# Altium PCB 电阻式.PcbDoc
Units mil, origin at the board's own origin, x right, y up, seen from the top; angles counter-clockwise.
Board outline 2915.1 x 2580.1 mil, 2 copper layers (Top Layer, Bottom Layer); 43 components, 20 nets, 104 pads, 0 vias.
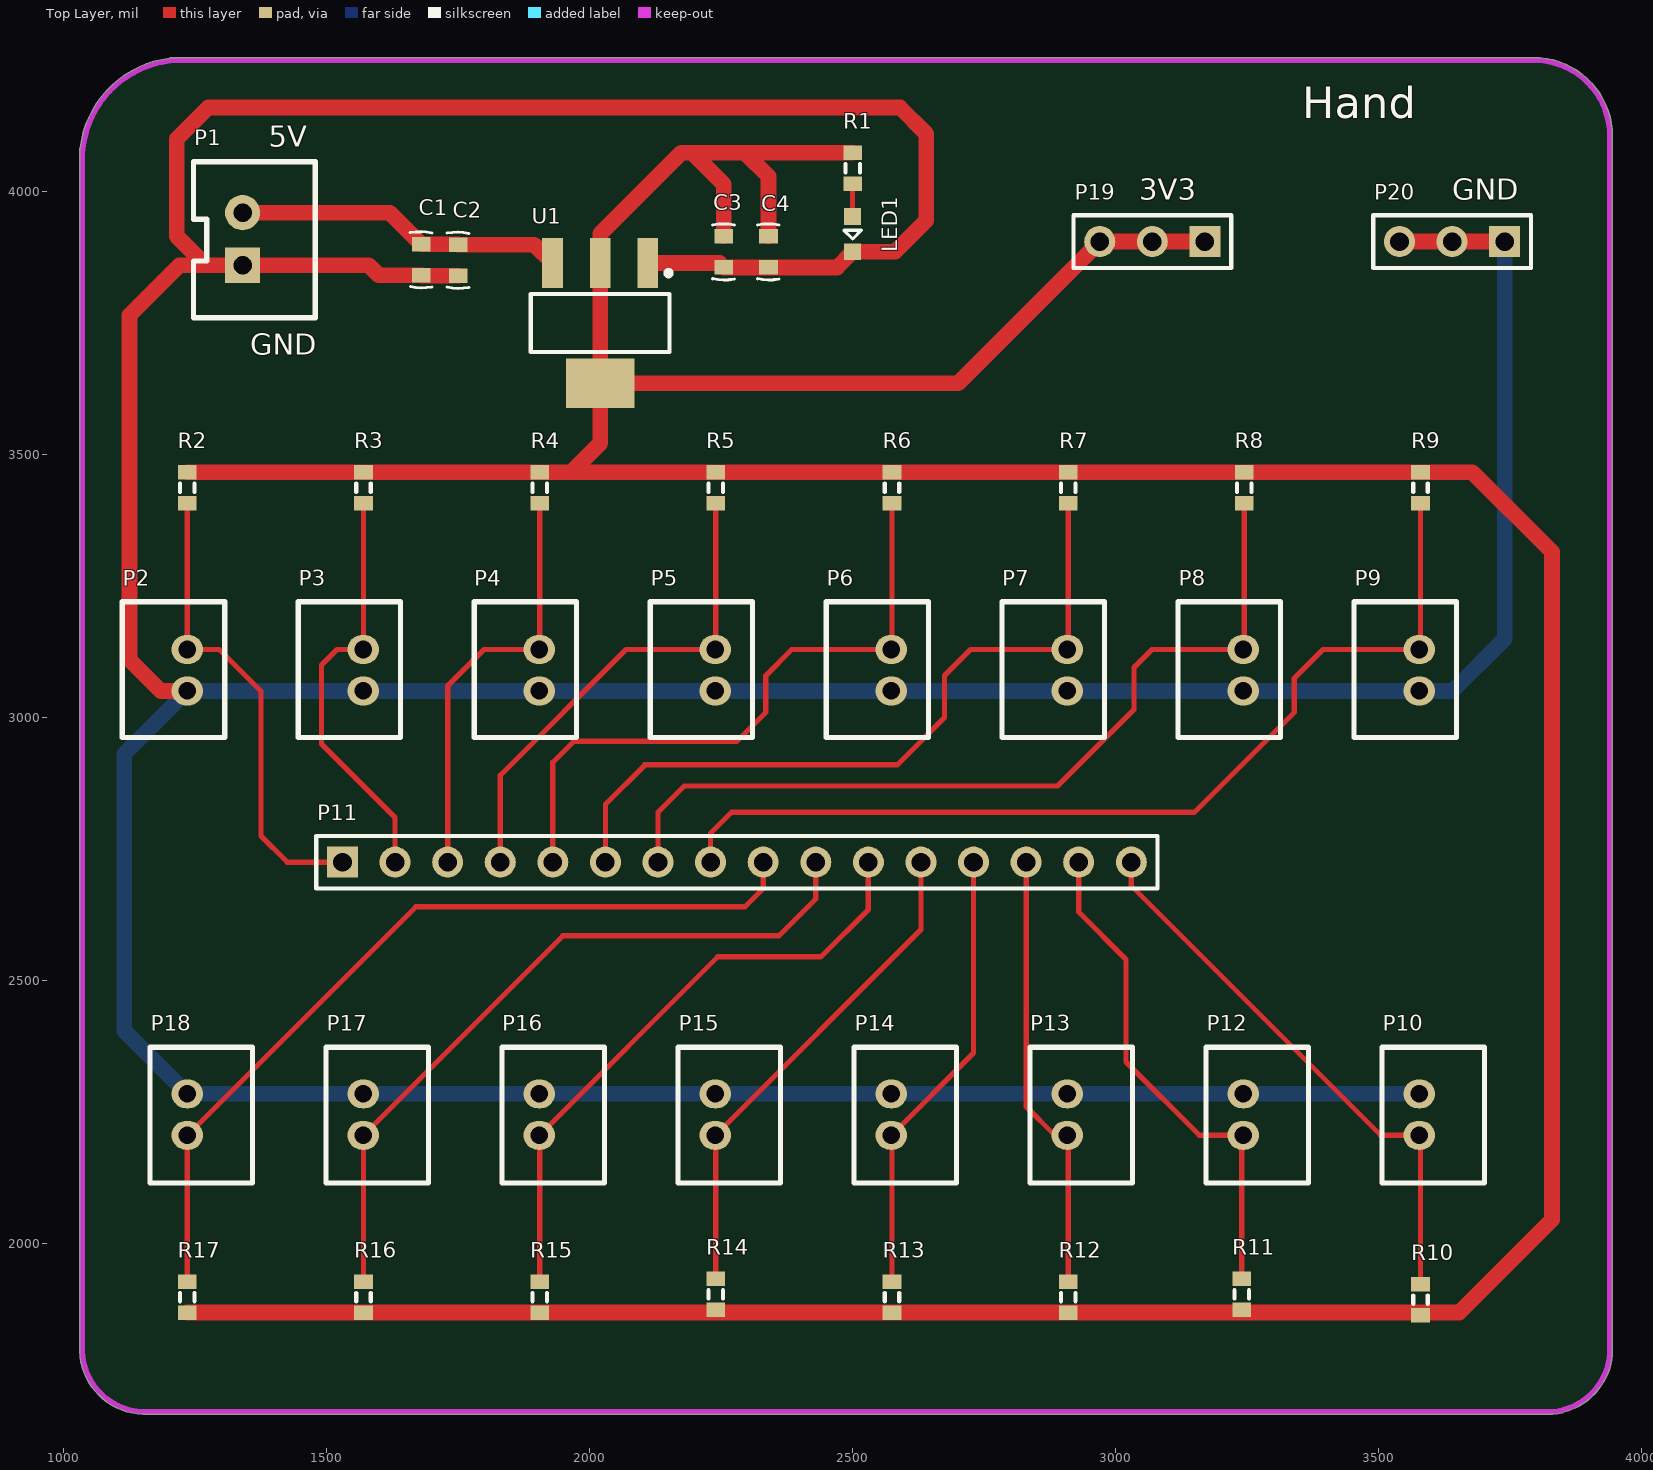
[diagram p0: Top Layer view]
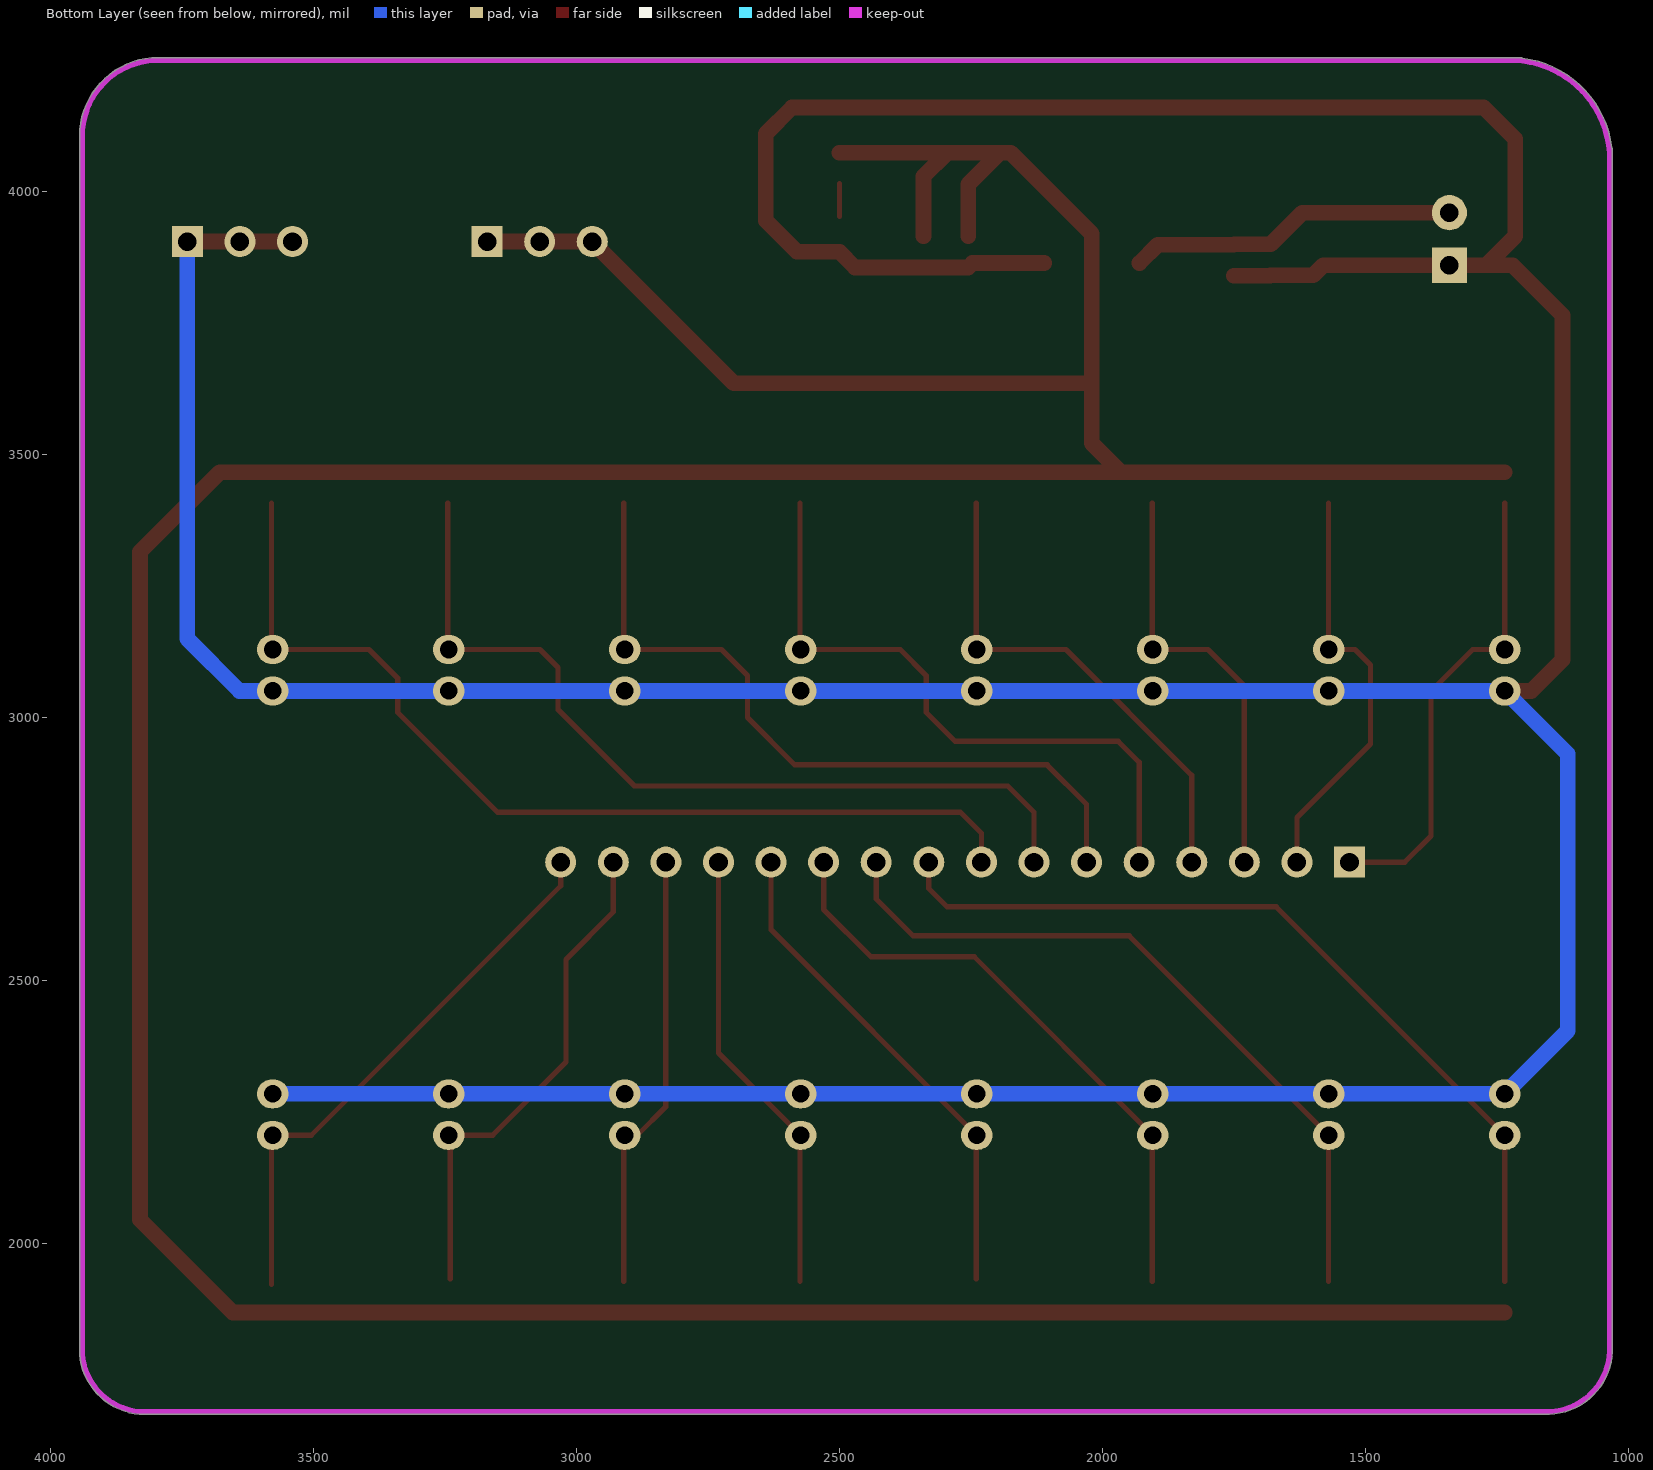
[diagram p1: Bottom Layer view, seen from below]
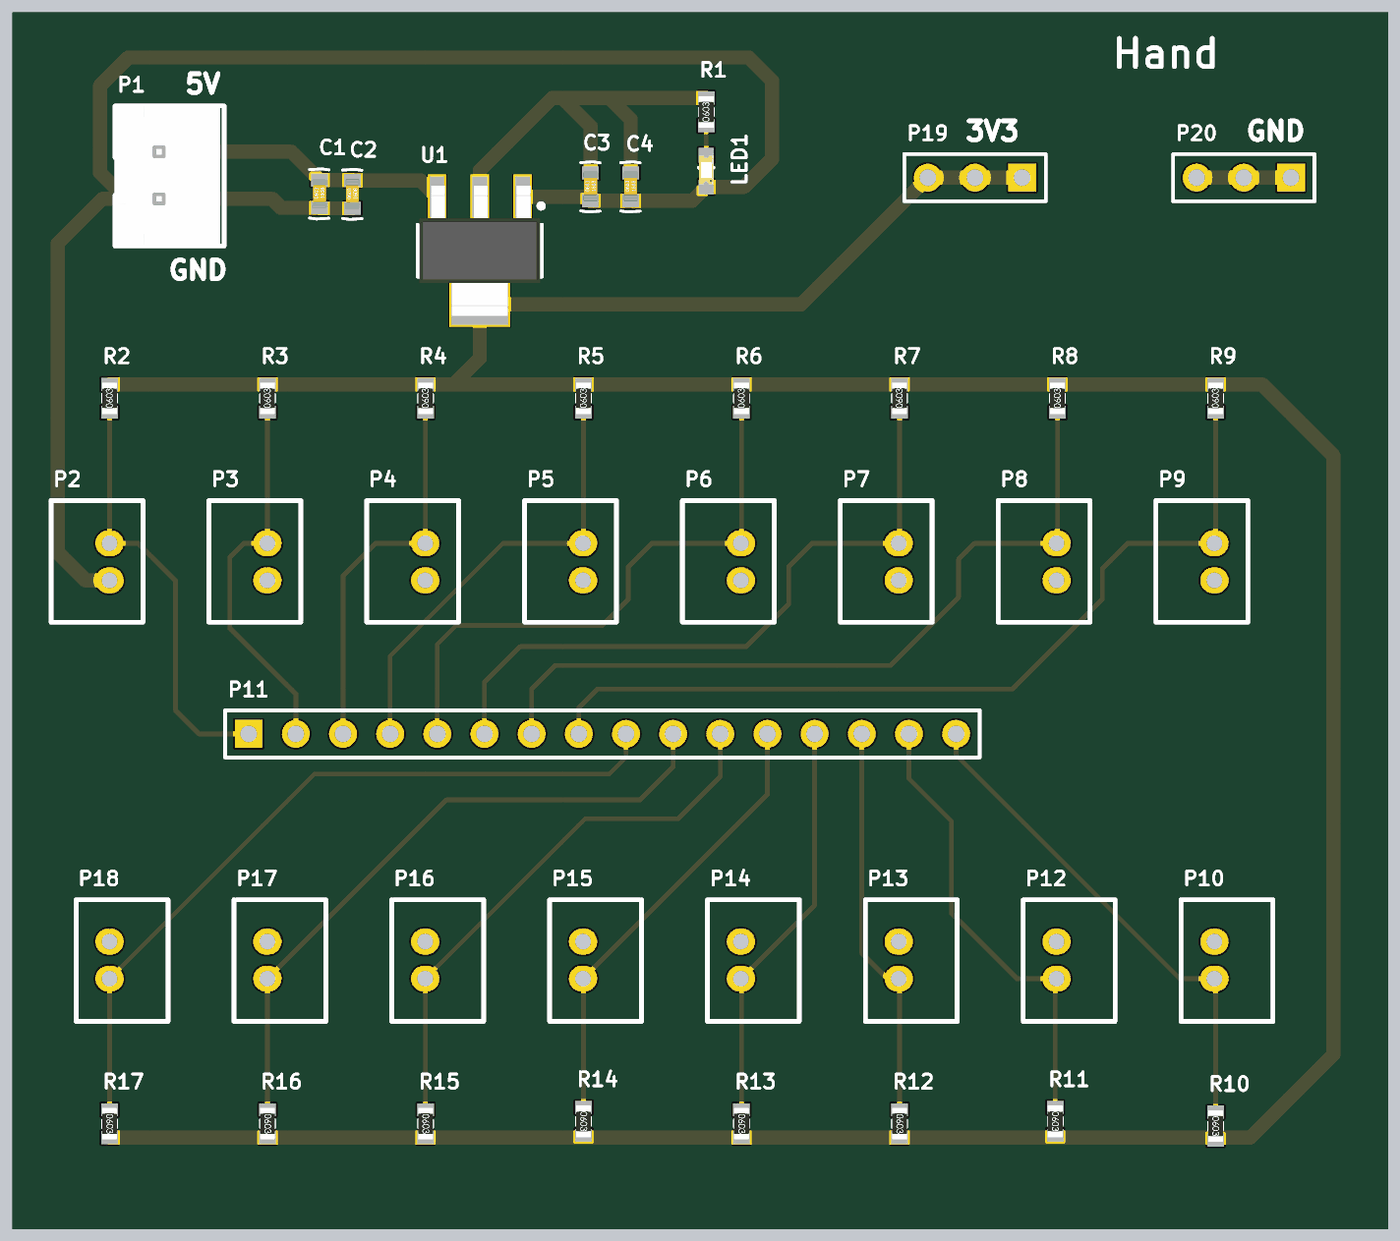
[diagram p2: 3D render of the assembled board from above, using the file's embedded part models]

## Layer stack, top to bottom
Top Solder: solder mask 0.4, Solder Resist, Dk 3.5
Top Layer: signal copper 1.4
Dielectric 1: dielectric 12.6, FR-4, Dk 4.8
Bottom Layer: signal copper 1.4
Bottom Solder: solder mask 0.4, Solder Resist, Dk 3.5

## Board outline
1029.99,1794.79 cw(c1035,1795) 1029.98,1795 1029.98,4059.19 cw(c1034.93,4060) 1029.92,4060 cw(c1225,4060) 1029.98,4065.07 1029.98,4080 cw(c1035,4080) 1031.33,4083.42 cw(c1225,4060) 1201.58,4253.67 cw(c1205,4250) 1205,4255.02 1219.93,4255.02 cw(c1225,4060) 1230.07,4255.02 cw(c1225,4060) 1230.13,4255.01 1230.07,4255.02 3795,4255.02 cw(c3795,4105) 3945.01,4105 3945.01,1790 cw(c3940,1790) 3945,1789.58 cw(c3820,1800) 3830.42,1675 cw(c3830,1680) 3830,1674.98 1150,1674.98 cw(c1150,1680) 1149.79,1674.99 cw(c1155,1800)

## Design rules (kind name [scope] priority, off if disabled: settings)
Clearance [All] p1: gap=10 ignorepadtopadclearanceinfootprint=FALSE except(0: Arc-Hole Track-Hole SMDPad-Hole THPad-Hole Via-Hole Fill-Hole Poly-Hole Region-Hole Text-Hole)
PolygonConnect [All] p1: connectstyle=Relief reliefconductorwidth=10 reliefentries=4 polygonreliefangle="90 Angle" airgapwidth=10
RoutingVias [All] p1: holewidth=28 width=50 viastyle="Through Hole" minholewidth=28 minwidth=50 maxholewidth=28 maxwidth=50
SolderMaskExpansion [All] p1: expansion=4
Width [All] p1: maxlimit=50 minlimit=10 preferedwidth=10
30 further rules are at their usual default settings.

## Components (designator, comment, footprint, x,y, rotation, side; value= is the part's Value field where it differs from the comment)
C1 "" C-0603 1701,3852.47 r90 top value=10uF
C2 "" C-0603 1771,3851.53 r90 top value=0.1uF
C3 "" C-0603 2276,3867.47 r90 top value=0.1uF
C4 "" C-0603 2361,3867.47 r90 top value=10uF
LED1 "" CLED1608-0603 2418,3906.53 r270 top
P1 "Header 2" XH2.54-LI-2P 1340,3910 r90 top
P2 "Header 2" XH2.0_2p 1235,3090 r270 top
P3 "Header 2" XH2.0_2p 1569.67,3090 r270 top
P4 "Header 2" XH2.0_2p 1904.33,3090 r270 top
P5 "Header 2" XH2.0_2p 2239,3090 r270 top
P6 "Header 2" XH2.0_2p 2573.67,3090 r270 top
P7 "Header 2" XH2.0_2p 2908.33,3090 r270 top
P8 "Header 2" XH2.0_2p 3243,3090 r270 top
P9 "Header 2" XH2.0_2p 3577.67,3090 r270 top
P10 "Header 2" XH2.0_2p 3577.67,2245 r90 top
P11 "Header 16" HDR1X16 1530,2725 r0 top
P12 "Header 2" XH2.0_2p 3243,2245 r90 top
P13 "Header 2" XH2.0_2p 2908.33,2245 r90 top
P14 "Header 2" XH2.0_2p 2573.67,2245 r90 top
P15 "Header 2" XH2.0_2p 2239,2245 r90 top
P16 "Header 2" XH2.0_2p 1904.33,2245 r90 top
P17 "Header 2" XH2.0_2p 1569.67,2245 r90 top
P18 "Header 2" XH2.0_2p 1235,2245 r90 top
P19 "Header 3" HDR1X3 3170,3905 r180 top
P20 "Header 3" HDR1X3 3740,3905 r180 top
R1 "Res3" R-0603 2500,4042.53 r90 top value=370R
R2 "Res3" R-0603 1235,3435 r90 top value=10k
R3 "Res3" R-0603 1570,3435 r90 top value=10k
R4 "Res3" R-0603 1905,3435 r90 top value=10k
R5 "Res3" R-0603 2240,3435 r90 top value=10k
R6 "Res3" R-0603 2575,3435 r90 top value=10k
R7 "Res3" R-0603 2910,3435 r90 top value=10k
R8 "Res3" R-0603 3245,3435 r90 top value=10k
R9 "Res3" R-0603 3580,3435 r90 top value=10k
R10 "Res3" R-0603 3580,1895 r270 top value=10k
R11 "Res3" R-0603 3240,1905 r270 top value=10k
R12 "Res3" R-0603 2910,1900 r270 top value=10k
R13 "Res3" R-0603 2575,1900 r270 top value=10k
R14 "Res3" R-0603 2240,1905 r270 top value=10k
R15 "Res3" R-0603 1905,1900 r270 top value=10k
R16 "Res3" R-0603 1570,1900 r270 top value=10k
R17 "Res3" R-0603 1235,1900 r270 top value=10k
U1 "AMS1117-3V3" LM317 2015,3750 r270 top value=Value

## Footprints (in the part's own frame and the unit in brackets; to place one, negate y for a bottom-side part, rotate by r counter-clockwise, add the part's x,y. Pads: shape width x height; smd on the part's side, far side on the other; paste and mask are expansions set on the pad)
C-0603 [mm]
  rect 0.7x0.9 smd: 1(-0.293,0.533) 2(1.207,0.533)
  silkscreen extent -0.9,0.02 1.81,1.07, body extent -0.32,0.13 1.28,0.93, height 0.8
CLED1608-0603 [mil]
  rect 32x32 smd: 1(-46,82) 2(20.93,82)
  silkscreen extent -20,65 -4,99, body extent -46,67 16,98, height 24
HDR1X3 [mm] "Connector; Header; 3 Position"
  rect 1.5x1.5 hole 0.9: 1(0,0)
  round 1.5 hole 0.9: 2(2.54,0) 3(5.08,0)
  silkscreen extent -1.27,-1.27 6.35,1.27
HDR1X16 [mm] "Connector; Header; 16 Position"
  rect 1.5x1.5 hole 0.9: 1(0,0)
  round 1.5 hole 0.9: 2(2.54,0) 3(5.08,0) 4(7.62,0) 5(10.16,0) 6(12.7,0) 7(15.24,0) 8(17.78,0) 9(20.32,0) 10(22.86,0) 11(25.4,0) 12(27.94,0) 13(30.48,0) 14(33.02,0) 15(35.56,0) 16(38.1,0)
  silkscreen extent -1.27,-1.27 39.37,1.27
LM317 [mm] "LM317, SOT23"
  rect 2.4x1 smd paste-0.102 mask+0.051: 1(-2.9,2.427) 2(-2.9,0.127) 3(-2.9,-2.173)
  rect 2.4x3.3 smd paste-0.102 mask+0.051: 4(2.9,0.127)
  silkscreen extent -2.54,-3.22 1.4,3.55, body extent -3.5,-3.12 3.5,3.38, height 1.68
R-0603 [mm]
  rect 0.7x0.9 smd: 1(-0.699,0) 2(0.801,0)
  silkscreen extent -0.15,-0.35 0.25,0.35, body extent -0.8,-0.4 0.9,0.4, height 0.56
XH2.0_2p [mm]
  oval 1.4x1.524 hole 0.85: 1(-1,0) 2(1,0)
  silkscreen extent -3.3,-3.15 3.25,1.8
XH2.54-LI-2P [mm] "接插件，2P"
  rect 1.7x1.7 hole 0.9: 1(-1.27,0)
  round 1.7 hole 0.9: 2(1.27,0)
  silkscreen extent -3.81,-3.51 3.74,2.37, body extent -3.77,-3.3 3.77,2.4, height 7.05

## Part data
C1 C2 C3 C4: library part "Cap Semi", "Capacitor (Semiconductor SIM Model)", LatestRevisionDate=29-May-2009, LatestRevisionNote="IPC-7351 Footprint Added.", PackageDescription="Chip Capacitor", PackageReference=C1206, Published=8-Jun-2000, Publisher="Altium Limited"
LED1: library part "LED Chip", "Typical Chip LED", Published=8-Jun-2000, Publisher="Altium Limited", Revision="July-2002: Re-released for DXP Platform."
P1 P2 P3 P4 P5 P6 P7 P8 P9 P10 P12 P13 P14 P15 P16 P17 P18: "Header, 2-Pin", LatestRevisionDate=17-Jul-2002, LatestRevisionNote="Re-released for DXP Platform.", Publisher="Altium Limited"
P11: "Header, 16-Pin", LatestRevisionDate=17-Jul-2002, LatestRevisionNote="Re-released for DXP Platform.", Publisher="Altium Limited"
P19 P20: "Header, 3-Pin", LatestRevisionDate=17-Jul-2002, LatestRevisionNote="Re-released for DXP Platform.", Publisher="Altium Limited"
R1 R2 R3 R4 R5 R6 R7 R8 R9 R10 R11 R12 R13 R14 R15 R16 R17: "Resistor", LatestRevisionDate=29-May-2009, LatestRevisionNote="IPC-7351 Footprint Added.", PackageDescription="Chip Resistor", PackageReference=J1-0603, Published=8-Jun-2000, Publisher="Altium Limited"
U1: library part LM317DCYR, "LM317DCYR-SOT223", Alternate_PartNumber=LM317DCY, Manufacturer="Texas Instruments", CompType=IC, MountType=SMT, PackageReference=DCY0004A, PartNumber=LM317DCYR, PIN_COUNT=4, RefDes=RefDes, RoHS=Y, SymbolCreater=Altium, TYPE=TYPE

## Nets (pads, with @x,y where several pads share a name; then routed paths per layer and width w, separated by ;. In a path a pad name is that pad's centre, name@x,y a point inside that pad or via, vN(x,y) a via of type N, cw(c..) or ccw(c..) an arc to the next point about the centre after c; other vN are vias at no path point)
ADC1: P2.1 P11.1 R2.1 | length 901.7
  Top Layer w10: R2.1 P2.1 1295.63,3129.37 1375,3050 1375,2775 1425,2725 P11.1
ADC2: P3.1 P11.2 R3.1 | length 803.1
  Top Layer w10: R3.1 1570,3129.7 P3.1 1519.37,3129.37 1490,3100 1490,2950 1630,2810 P11.2
ADC3: P4.1 P11.3 R4.1 | length 816.4
  Top Layer w10: P11.3 1730,3060 1799.37,3129.37 P4.1 1905,3130.04 R4.1
ADC4: P5.1 P11.4 R5.1 | length 951.7
  Top Layer w10: P11.4 1830,2890 2069.37,3129.37 P5.1 2240,3130.37 R5.1
ADC5: P6.1 P11.5 R6.1 | length 1242.1
  Top Layer w10: P11.5 1930,2915 1970,2955 2280,2955 2335,3010 2335,3080 2384.37,3129.37 P6.1 2575,3130.7 R6.1
ADC6: P7.1 P11.6 R7.1 | length 1435.9
  Top Layer w10: P11.6 2030,2835 2105,2910 2585,2910 2675,3000 2675,3080 2724.37,3129.37 P7.1 2910,3131.04 R7.1
ADC7: P8.1 P11.7 R8.1 | length 1661.9
  Top Layer w10: P11.7 2130,2820 2180,2870 2890,2870 3035,3015 3035,3095 3069.37,3129.37 P8.1 3245,3131.37 R8.1
ADC8: P9.1 P11.8 R9.1 | length 1864.5
  Top Layer w10: P11.8 2230,2780 2270,2820 3150,2820 3340,3010 3340,3075 3394.37,3129.37 P9.1 3580,3131.7 R9.1
ADC9: P11.9 P18.1 R17.1 | length 1617.5
  Top Layer w10: R17.1 P18.1 1669.37,2640 2295,2640 2330,2675 P11.9
ADC10: P11.10 P17.1 R16.1 | length 1394.7
  Top Layer w10: R16.1 1570,2205.3 P17.1 1949.04,2585 2360,2585 2430,2655 P11.10
ADC11: P11.11 P16.1 R15.1 | length 1171.9
  Top Layer w10: R15.1 1905,2204.96 P16.1 2243.7,2545 2440,2545 2530,2635 P11.11
ADC12: P11.12 P15.1 R14.1 | length 954.8
  Top Layer w10: R14.1 2240,2204.63 P15.1 2630,2596.63 P11.12
ADC13: P11.13 P14.1 R13.1 | length 862.8
  Top Layer w10: R13.1 2575,2204.3 P14.1 2730,2361.96 P11.13
ADC14: P11.14 P13.1 R12.1 | length 844.6
  Top Layer w10: P11.14 2830,2260 2884.37,2205.63 P13.1 2910,2203.96 R12.1
ADC15: P11.15 P12.1 R11.1 | length 972.4
  Top Layer w10: P11.15 2930,2630 3020,2540 3020,2345 3159.37,2205.63 P12.1 3240,2202.63 R11.1
ADC16: P10.1 P11.16 R10.1 | length 1073.2
  Top Layer w10: P11.16 3030,2680 3504.37,2205.63 P10.1 3580,2203.3 R10.1
AGND: C1.1 C2.1 C3.1 C4.1 LED1.2 P1.1 P2.2 P3.2 P4.2 P5.2 P6.2 P7.2 P8.2 P9.2 P10.2 P12.2 P13.2 P14.2 P15.2 P16.2 P17.2 P18.2 P20.1 P20.2 P20.3 U1.1 | length 10639.8
  Top Layer w30: P2.2 1184.37,3050.63 1125,3110 1125,3765 1220,3860 1270,3860 ; C2.1 1680.94,3840 C1.1 1599.06,3840.94 1580,3860 P1.1 1270,3860 ; U1.1 2246.77,3864.17 C3.1 C4.1 2470.35,3855.94 LED1.2 2580.6,3885.6 2640,3945 2640,4110 2590,4160 1275,4160 1215,4100 1215,3915 1270,3860 ; P20.3 P20.2 P20.1
  Bottom Layer w30: P10.2 P12.2 P13.2 P14.2 P15.2 P16.2 P17.2 P18.2 1115,2404.37 1115,2930.63 P2.2 P3.2 P4.2 P5.2 P6.2 P7.2 P8.2 P9.2 3640.63,3050.63 3740,3150 P20.1
DVDD_3V3: C3.2 C4.2 P19.1 P19.2 P19.3 R1.2 R2.2 R3.2 R4.2 R5.2 R6.2 R7.2 R8.2 R9.2 R10.2 R11.2 R12.2 R13.2 R14.2 R15.2 R16.2 R17.2 U1.2 U1.4 | length 9239
  Top Layer w30: R17.2 R16.2 R15.2 R13.2 R12.2 3653.47,1868.47 3830,2045 3830,3315 3678.47,3466.53 R9.2 R8.2 R7.2 R6.2 R5.2 1965,3466.53 ; R2.2 R3.2 R4.2 1965,3466.53 ; C3.2 2255,4014.06 2195,4074.06 ; C4.2 2340,4029.06 2295,4074.06 ; R1.2 2295,4074.06 ; P19.1 P19.2 P19.3 2700.83,3635.83 U1.4 ; 1965,3466.53 2020,3521.53 U1.4 ; U1.4 U1.2 2020,3920 2174.06,4074.06 2195,4074.06 ; 2195,4074.06 2295,4074.06
NetLED1_1: LED1.1 R1.1 | length 62.5
  Top Layer w10: LED1.1 R1.1
VDD_5V: C1.2 C2.2 P1.2 U1.3 | length 629.1
  Top Layer w30: P1.2 1620,3960 C1.2 1749.06,3900 C2.2 1894.57,3899.06 U1.3

## Keep-outs
Keep-Out Layer:
  lines w10: 1034.93,4060 cw(c1225,4060) 1230,4250 ; 1035,2115 1035,2615 1035,4080 ; 1035,2130 1035,1795 ccw(c1155,1800) 1150,1680 3830,1680 ccw(c3820,1800) 3940,1790 3940,4105 ccw(c3795,4105) 3795,4250 1205,4250

## Silkscreen, mask and mechanical layers (free items; w line width, h text height)
Top Overlay:
  text "Hand" at 3355,4140 h60
  text "5V" at 1390,4085 h40
  text "3V3" at 3045,3985 h40
  text "GND" at 3640,3985 h40
  text "GND" at 1355,3690 h40